# EAGLE board miranda_hector_115clock-2 (EAGLE 9.6.2)
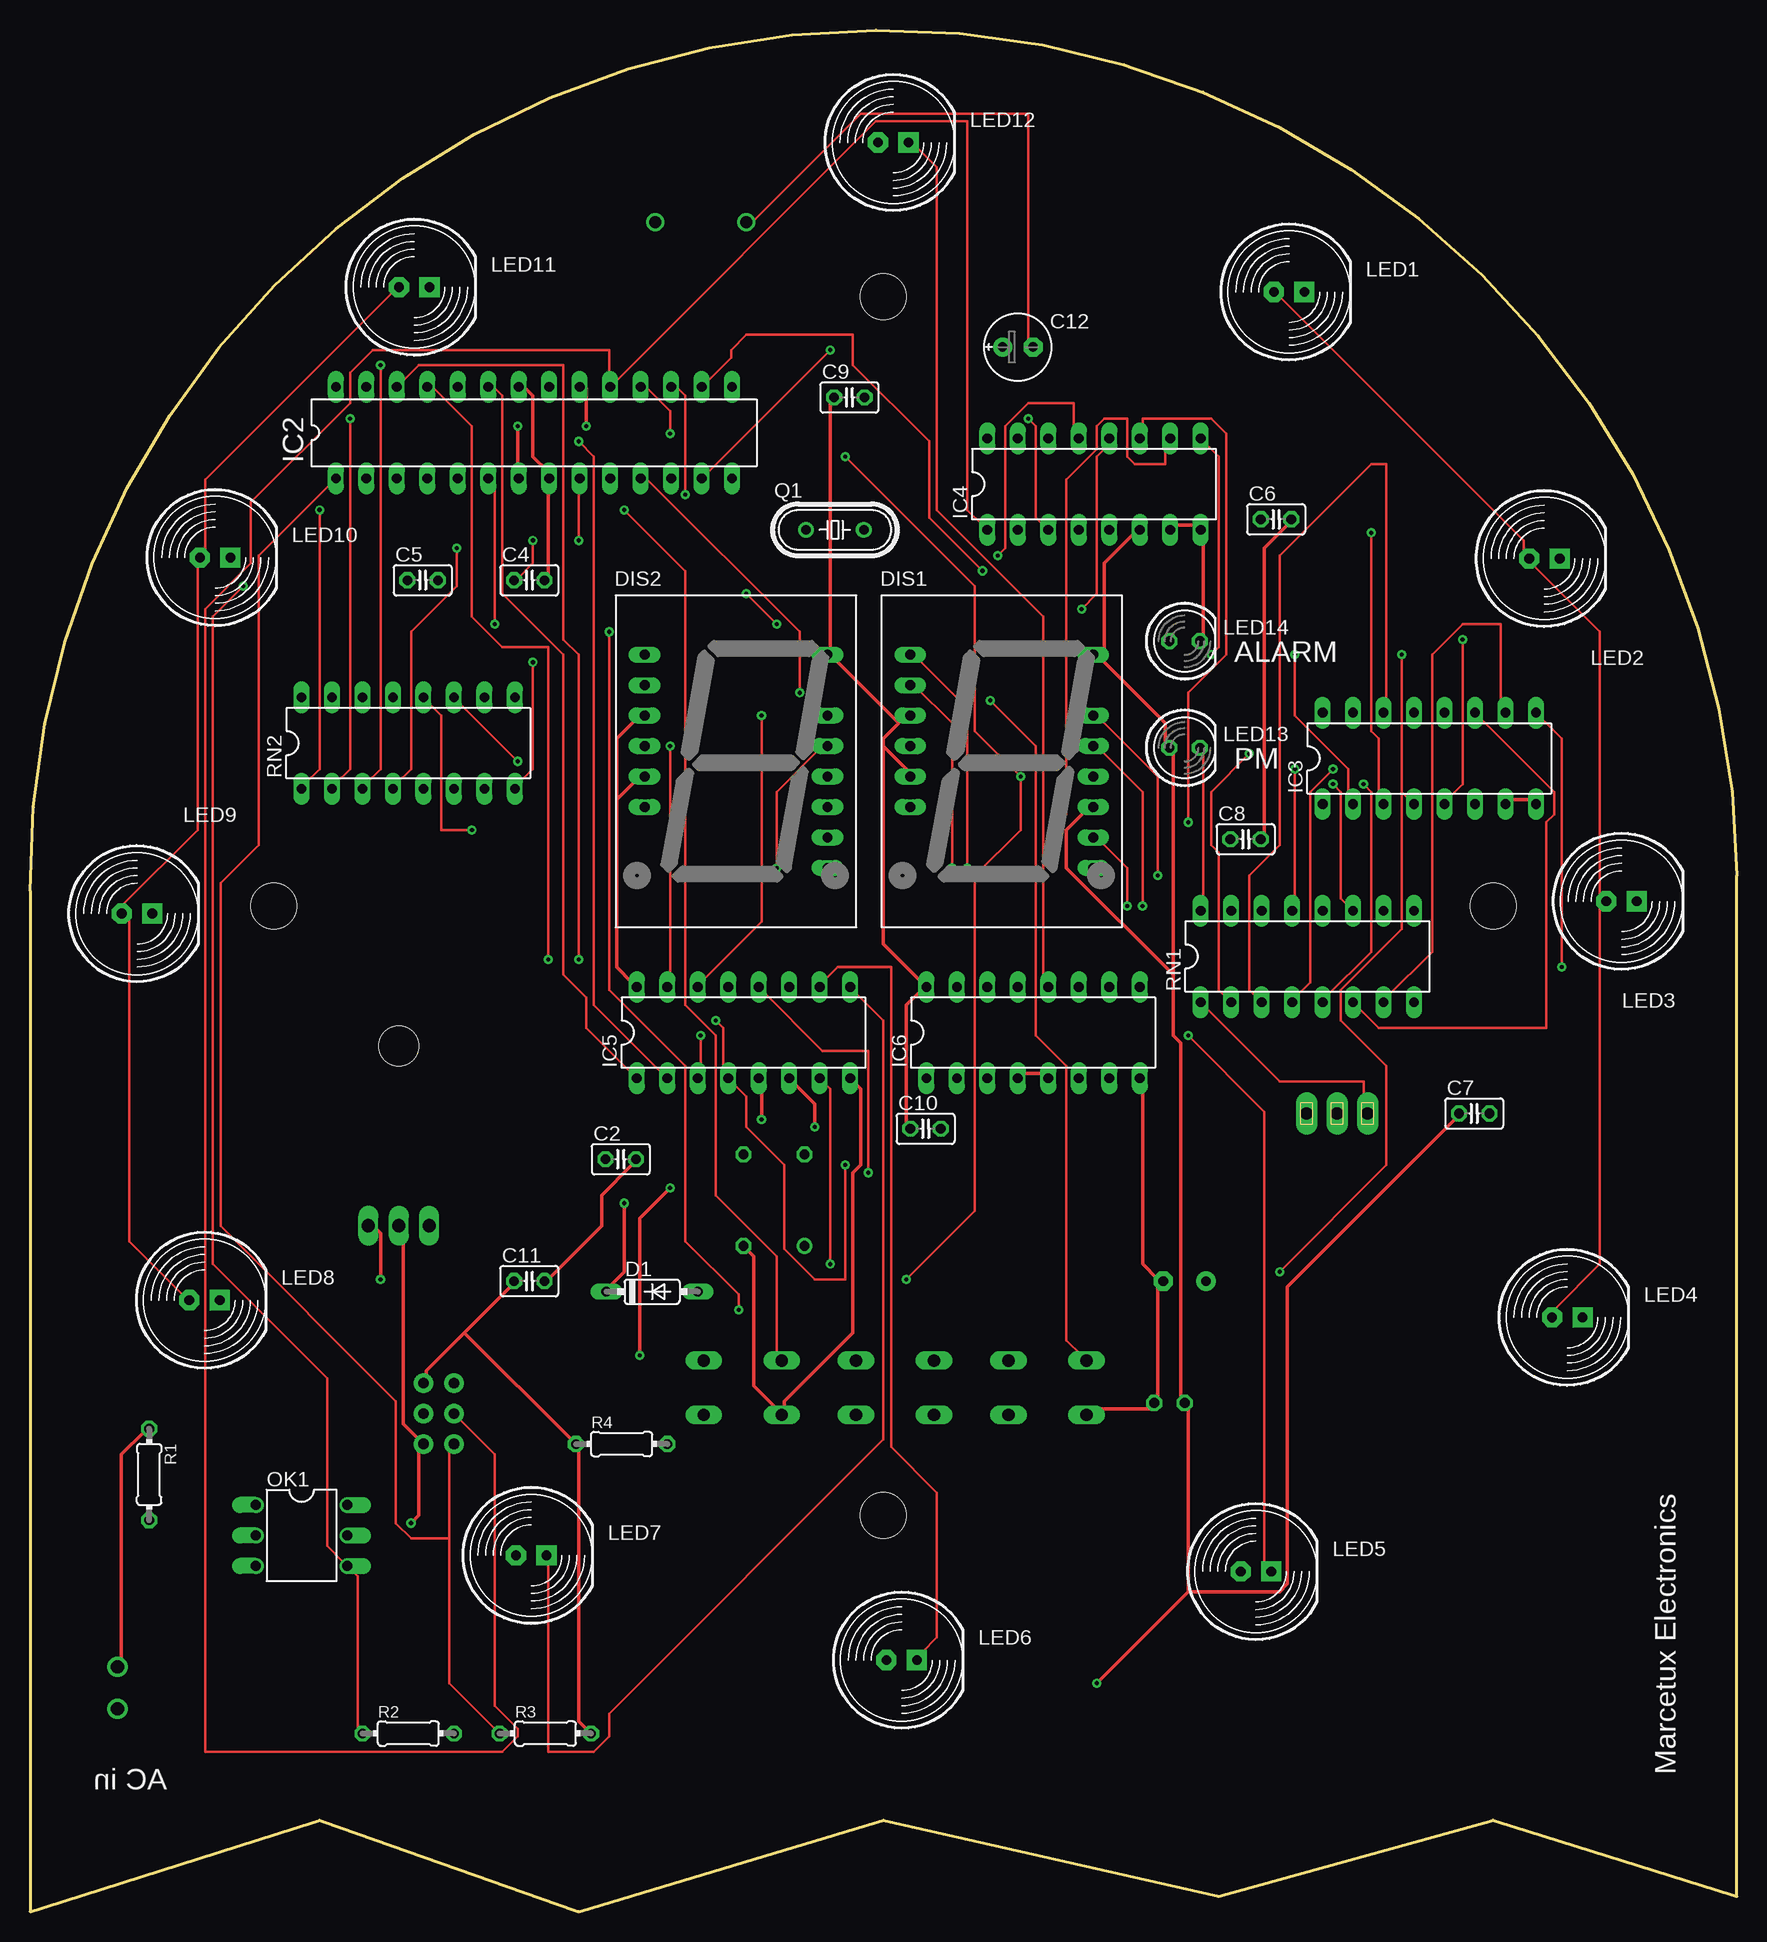
[diagram p0: board, top side]
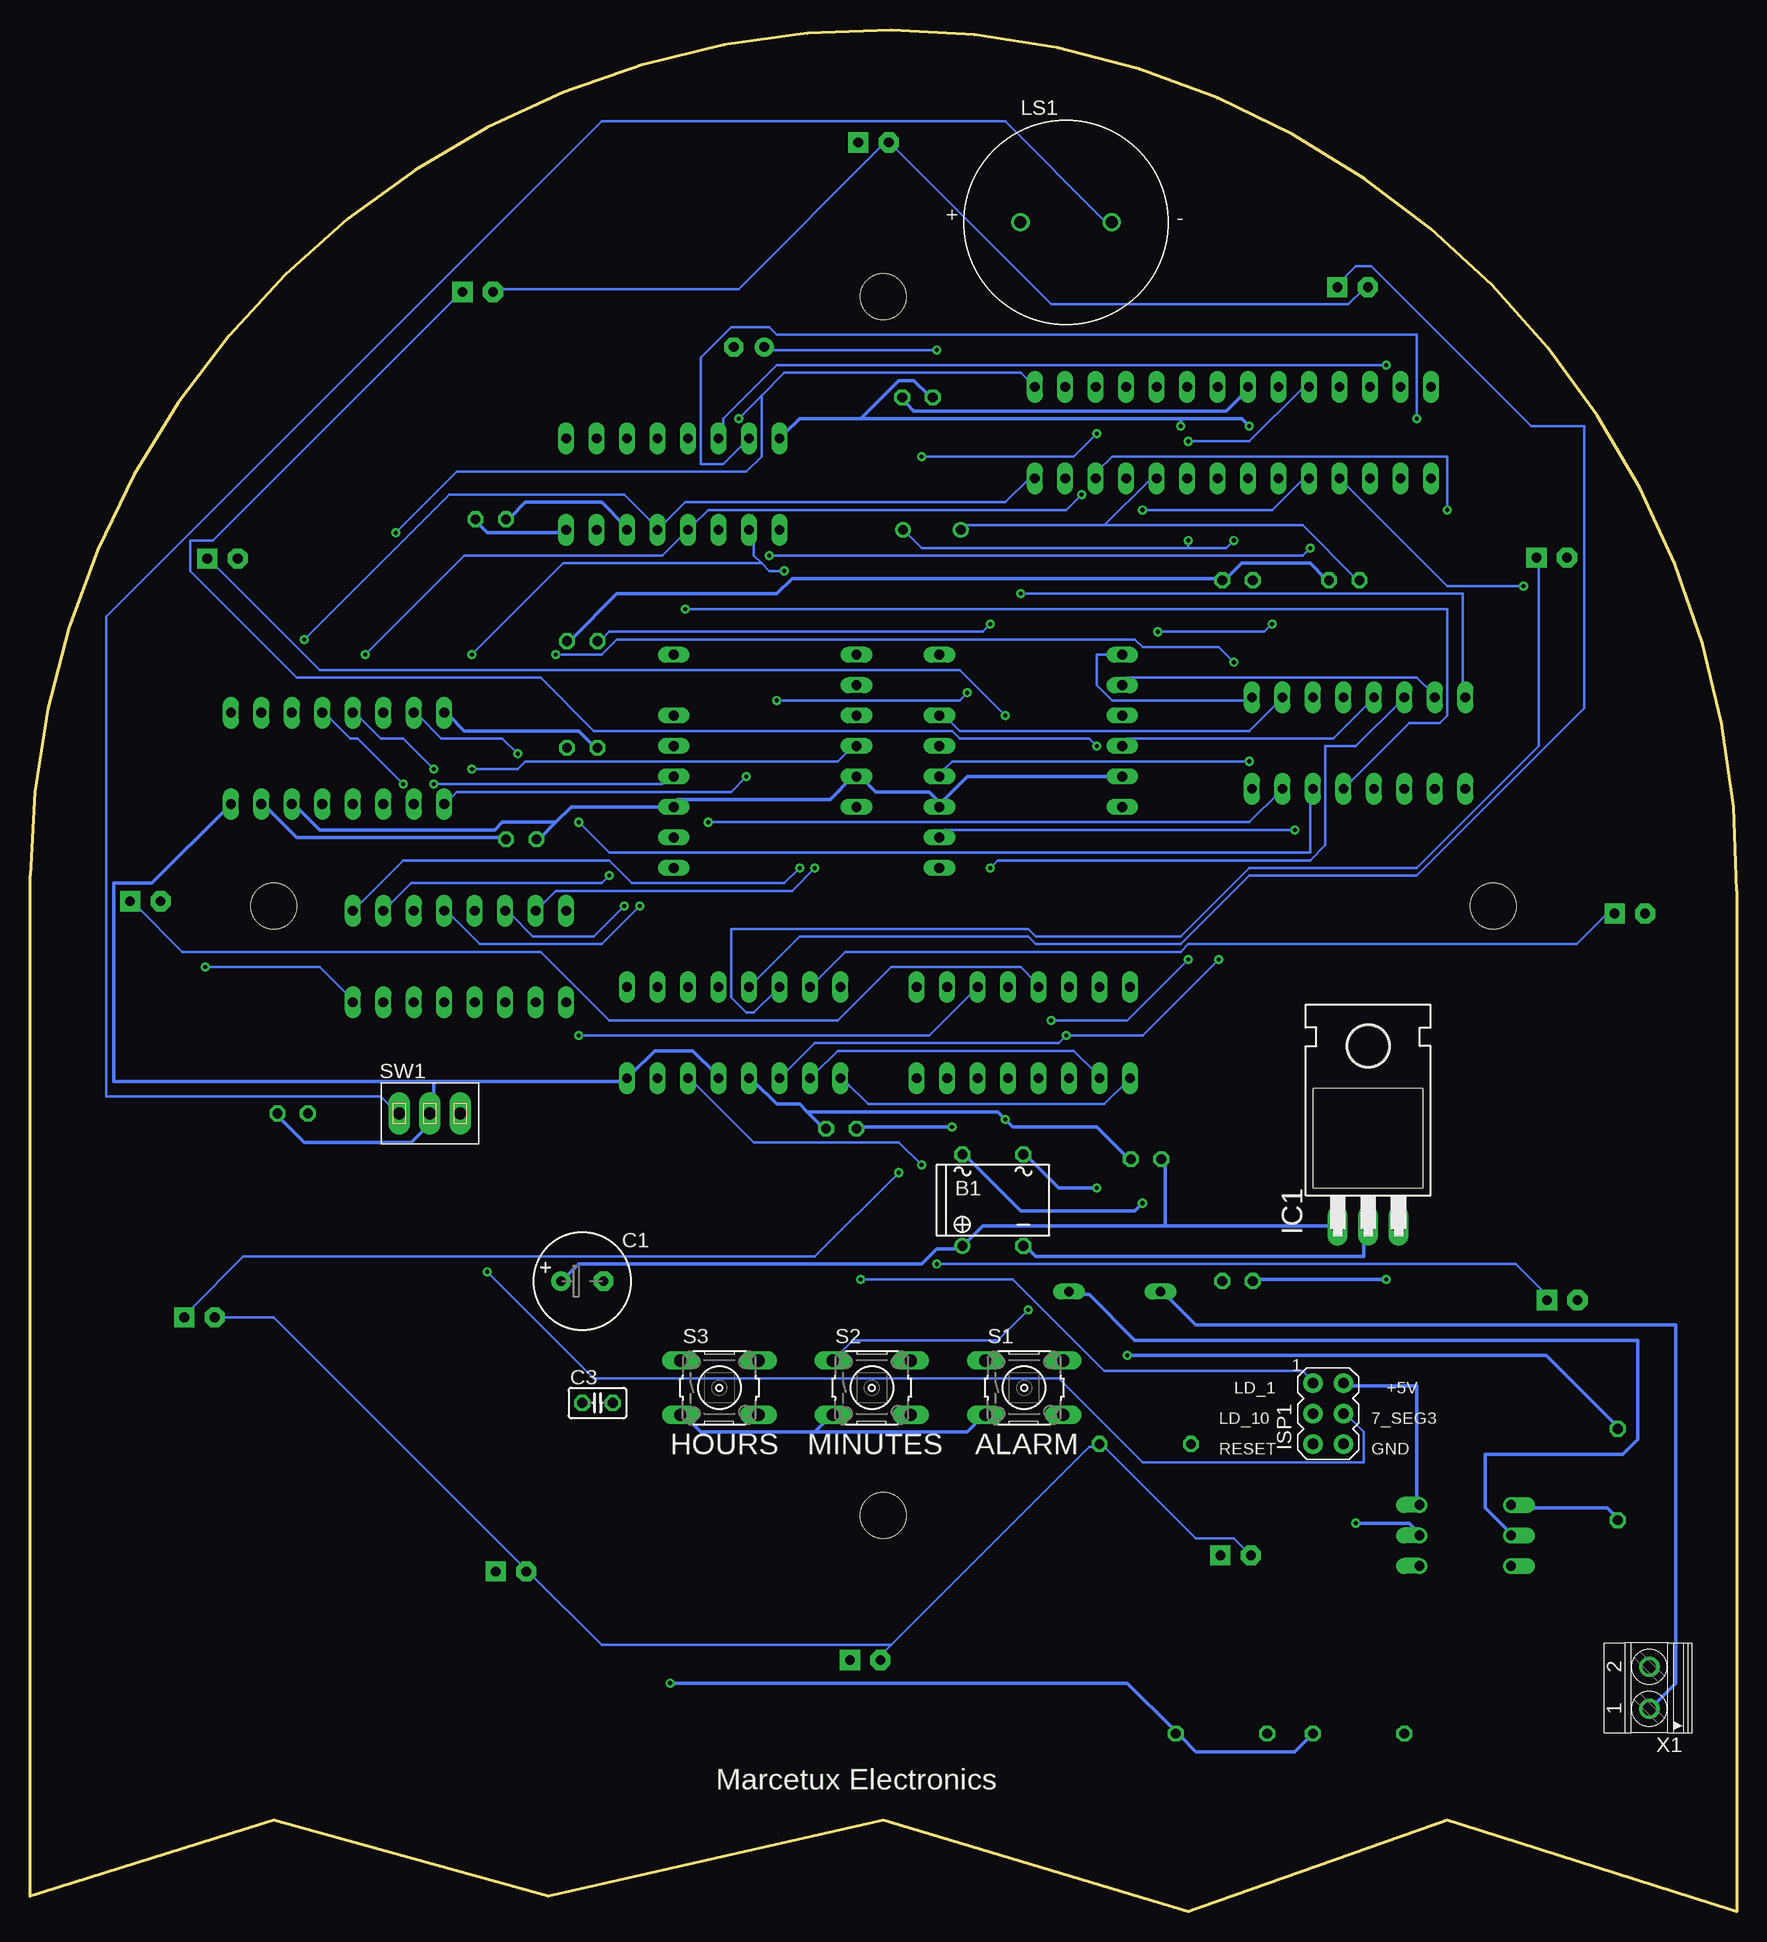
[diagram p1: board, bottom side, seen from below]

Size 142.24 x 156.84 mm. Coordinates in mm from the lower left corner, seen from the top.
Outline: 0,85.09 0,0 24.13,7.62 45.72,0 71.12,7.62 99.06,1.27 121.92,7.62 142.24,1.27 142.24,86.36 arc180 0,85.09
Copper layers (1*16): Top 0.035mm / dielectric 1.5mm / Bottom 0.035mm
Design rules "default": minimum track width 6mil, minimum drill 0.35mm, track to track 6mil, track to pad 6mil, pad to pad 6mil, via to via 6mil, smd to smd 6mil, copper to edge 40mil, drill to drill 6mil, minimum pad ring 10mil, minimum via ring 8mil, stop-mask expansion 4mil, vias tented up to drill 0mil, thermal gap 10mil
Net classes: 0 default: width 0.203 mm, clearance 0.203 mm; 1 AC: width 0.305 mm, clearance 0.762 mm; 2 Power: width 0.305 mm, clearance 0.305 mm
Holes 3.81 mm at 71.12,134.62 71.12,33.02 20.32,83.82 121.92,83.82
tRestrict: area 67.3,130.8 to 74.9,138.4; area 16.3,79.8 to 24.3,87.8; area 117.9,79.8 to 125.9,87.8; area 67.1,29 to 75.1,37; area 16.5,59.7 to 44.5,77.5
bRestrict: area 16.5,59.7 to 44.5,77.5

## Footprints (pad centres in the part's own frame; a part is rotated, then mirrored left to right if it is on the bottom)
B-DIL = drill 0.813: + -2.54,-3.81 | drill 0.813 octagon: - 2.54,-3.81; AC1 2.54,3.81; AC2 -2.54,3.81
E3,5-8 = drill 0.813 pad 1.6: + -1.778,0 | drill 0.813 pad 1.6 octagon: - 1.778,0
C025-025X050 = drill 0.813 octagon: 1 -1.27,0; 2 1.27,0
E2,5-6E = drill 0.813 pad 1.575: + -1.27,0 | drill 0.813 pad 1.575 octagon: - 1.27,0
DO35-7 = drill 0.813 long: A 3.81,0; C -3.81,0
HDSP-Q = drill 0.813 long: 2 -7.62,8.89; 3 -7.62,6.35; 4 -7.62,3.81; 5 -7.62,1.27; 6 -7.62,-1.27; 7 -7.62,-3.81; 10 7.62,-8.89; 11 7.62,-6.35; 12 7.62,-3.81; 13 7.62,-1.27; 14 7.62,1.27; 15 7.62,3.81; 17 7.62,8.89
TO220H = drill 1.118 long: 1 -2.54,-10.16; 2 0,-10.16; 3 2.54,-10.16 | hole 3.302: 0,4.826
DIL28-3 = drill 0.813 long: 1 -16.51,-3.81; 2 -13.97,-3.81; 3 -11.43,-3.81; 4 -8.89,-3.81; 5 -6.35,-3.81; 6 -3.81,-3.81; 7 -1.27,-3.81; 8 1.27,-3.81; 9 3.81,-3.81; 10 6.35,-3.81; 11 8.89,-3.81; 12 11.43,-3.81; 13 13.97,-3.81; 14 16.51,-3.81; 15 16.51,3.81; 16 13.97,3.81; 17 11.43,3.81; 18 8.89,3.81; 19 6.35,3.81; 20 3.81,3.81; 21 1.27,3.81; 22 -1.27,3.81; 23 -3.81,3.81; 24 -6.35,3.81; 25 -8.89,3.81; 26 -11.43,3.81; 27 -13.97,3.81; 28 -16.51,3.81
DIL16 = drill 0.813 long: 1 -8.89,-3.81; 2 -6.35,-3.81; 3 -3.81,-3.81; 4 -1.27,-3.81; 5 1.27,-3.81; 6 3.81,-3.81; 7 6.35,-3.81; 8 8.89,-3.81; 9 8.89,3.81; 10 6.35,3.81; 11 3.81,3.81; 12 1.27,3.81; 13 -1.27,3.81; 14 -3.81,3.81; 15 -6.35,3.81; 16 -8.89,3.81
AVRISP = drill 0.9 pad 1.626: 1 -1.27,2.54; 2 1.27,2.54; 3 -1.27,0; 4 1.27,0; 5 -1.27,-2.54; 6 1.27,-2.54
LED10MM = drill 0.813 pad 1.676 octagon: A -1.27,0 | drill 0.813 pad 1.676 square: K 1.27,0
LED5MM = drill 0.813 octagon: A -1.27,0; K 1.27,0
SPKR_CVS-1708 = drill 1: M 3.8,0; P -3.8,0
DIL06 = drill 0.813 offset: 1 -2.54,-3.81; 2 0,-3.81; 3 2.54,-3.81; 4 2.54,3.81; 5 0,3.81; 6 -2.54,3.81
HC49/S = drill 0.813: 1 -2.413,0; 2 2.413,0
0204/7 = drill 0.813 octagon: 1 -3.81,0; 2 3.81,0
B3F-10XX = drill 1.016 long: 1 -3.251,2.261; 2 3.251,2.261; 3 -3.251,-2.261; 4 3.251,-2.261
FOOTPRINT_DIGICLOCK_S5 = drill 1.016 pad 1.778 long: 1 -2.54,0; 2 0,0; 3 2.54,0
1751248 = drill 1.1 pad 1.7: 1 -1.75,-0.1; 2 1.75,-0.1

## Placement (x,y rotation side)
B1  [B-DIL]  62,59.3 0 bottom
C1  470uF  [E3,5-8]  96.22,52.56 0 bottom
C2  0.1uF  [C025-025X050]  49.23,62.72 0 top
C3  0.1uF  [C025-025X050]  94.95,42.4 0 bottom
C4  22pF  [C025-025X050]  41.61,110.98 0 top
C5  22pF  [C025-025X050]  32.72,110.98 0 top
C6  0.1uF  [C025-025X050]  103.84,116.06 0 top
C7  0.1uF  [C025-025X050]  120.35,66.53 0 top
C8  0.1uF  [C025-025X050]  101.3,89.39 0 top
C9  0.1uF  [C025-025X050]  68.28,126.22 0 top
C10  0.1uF  [C025-025X050]  74.63,65.26 0 top
C11  0.1uF  [C025-025X050]  41.61,52.56 0 top
C12  10uF  [E2,5-6E]  82.32,130.42 0 top
D1  1N4148DO35-7  [DO35-7]  51.84,51.68 0 top
DIS1  HD-N100  [HDSP-Q]  80.98,95.89 0 top
DIS2  HD-N100  [HDSP-Q]  58.84,95.89 0 top
IC1  7805T  [TO220H]  30.73,67.33 0 bottom
IC2  MEGA328-P  [DIL28-3]  42,123.28 0 top
IC3  4543N  [DIL16]  116.61,96.13 0 top
IC4  4543N  [DIL16]  88.67,118.99 0 top
IC5  74LS138N  [DIL16]  59.46,73.27 0 top
IC6  74LS138N  [DIL16]  83.59,73.27 0 top
ISP1  AVRISP-6  [AVRISP]  34.06,41.52 0 bottom
LED1  [LED10MM]  104.93,135.01 0 top
LED2  [LED10MM]  126.2,112.79 0 top
LED3  [LED10MM]  132.63,84.22 0 top
LED4  [LED10MM]  128.11,49.54 0 top
LED5  [LED10MM]  102.16,28.35 0 top
LED6  [LED10MM]  72.64,20.97 0 top
LED7  [LED10MM]  41.77,29.7 0 top
LED8  [LED10MM]  14.55,50.97 0 top
LED9  [LED10MM]  8.92,83.19 0 top
LED10  [LED10MM]  15.43,112.87 0 top
LED11  [LED10MM]  32.02,135.41 0 top
LED12  [LED10MM]  71.94,147.47 0 top
LED13  [LED5MM]  96.22,97.01 0 top
LED14  [LED5MM]  96.22,105.9 0 top
LS1  CVS-1708  [SPKR_CVS-1708]  55.9,140.82 0 bottom
OK1  H11L1M  [DIL06]  22.63,31.36 270 top
Q1  16Mhz  [HC49/S]  67.08,115.18 0 top
R1  1K  [0204/7]  9.93,36.44 270 top
R2  1K  [0204/7]  31.52,14.85 0 top
R3  1K  [0204/7]  42.95,14.85 0 top
R4  330  [0204/7]  49.3,38.98 0 top
RN1  330  [DIL16]  106.45,79.62 0 top
RN2  330  [DIL16]  31.52,97.4 0 top
S1  [B3F-10XX]  59.39,43.67 0 bottom
S2  [B3F-10XX]  72.09,43.67 0 bottom
S3  [B3F-10XX]  84.79,43.67 0 bottom
SW1  [FOOTPRINT_DIGICLOCK_S5]  108.92,66.53 0 bottom
X1  1751248  [1751248]  7.39,18.66 90 bottom

## Library data of the parts
B1 = rectifier
C1-C12 = rcl; SPICEPREFIX: C
D1 = diode
DIS1 DIS2 = display-hp; OC_FARNELL: unknown; OC_NEWARK: unknown
IC1 = linear
IC2 = atmel; OC_FARNELL: unknown; OC_NEWARK: unknown
IC3 IC4 = 45xx
IC5 IC6 = 74xx-eu
ISP1 = adafruit
LED1-LED14 = led
LS1 = CVS-1708; AVAILABILITY: Good; DESCRIPTION: CLS Series 8 Ohm 1500 Hz 87 dB 0.2 W Ø 17 x 8 mm Magnetic Speaker; MF: CUI; MP: CVS-1708; PACKAGE: CUI; PRICE: 2.13 USD
OK1 = optocoupler; MF: FAIRCHILD SEMICONDUCTOR; MPN: H11L1-M; OC_FARNELL: 1021127; OC_NEWARK: 72K8643
Q1 = crystal; OC_FARNELL: 1667008; OC_NEWARK: unknown
R1-R4 = rcl; SPICEPREFIX: R
RN1 RN2 = resistor-dil; OC_FARNELL: unknown; OC_NEWARK: unknown
S1-S3 = switch-omron; MPN: B3F-1000; OC_FARNELL: 176432; OC_NEWARK: 36M3542
SW1 = Digiclock_S5
X1 = con-phoenix-350; OC_FARNELL: unknown; OC_NEWARK: unknown

## Nets
7_SEG0: IC2.14 IC3.5 IC4.5
7_SEG1: IC2.15 IC3.3 IC4.3
7_SEG2: IC2.16 IC3.2 IC4.2
7_SEG3: IC2.17 IC3.4 IC4.4 ISP1.4
+5V [Power]: C3.1 C6.1 C7.1 C8.1 C9.1 C10.1 C11.1 DIS1.4 DIS1.6 DIS1.12 DIS1.17 DIS2.4 DIS2.6 DIS2.12 DIS2.17 IC1.3 IC2.7 IC2.20 IC3.6 IC3.16 IC4.6 IC4.16 IC5.6 IC5.16 IC6.16 ISP1.2 LED13.A OK1.6 R2.2 R3.2 R4.1
ALARM_ON/OFF: LS1.M RN1.1 SW1.1
ALARM_OUT: C12.+ IC2.13
ALARM_SET: IC2.11 S3.1
AM/PM: IC2.12 RN2.1
GND [Power]: B1.- C1.- C2.2 C3.2 C4.2 C5.2 C6.2 C7.2 C8.2 C9.2 C10.2 C11.2 IC1.2 IC2.8 IC2.22 IC3.7 IC3.8 IC4.7 IC4.8 IC5.5 IC5.8 IC6.4 IC6.5 IC6.8 ISP1.6 LED14.K OK1.5 S1.3 S2.3 S3.3 SW1.2
HOURS_SET: IC2.6 S2.1
INT_0: IC2.4 OK1.4 R2.1
LD_1: IC2.18 IC3.1 ISP1.1
LD_10: IC2.19 IC4.1 ISP1.3
LED_ADDR0: IC2.23 IC5.1 IC6.1
LED_ADDR1: IC2.24 IC5.2 IC6.2
LED_ADDR2: IC2.25 IC5.3 IC6.3
LED_ADDR3: IC2.26 IC5.4 IC6.6
MINUTES_SET: IC2.5 S1.1
N$1 [AC]: B1.AC2 D1.C X1.1
N$2 [AC]: B1.AC1 R1.1 X1.2
N$3 [AC]: OK1.1 R1.2
N$4 [AC]: D1.A OK1.2
N$5: C4.1 IC2.9 Q1.2
N$6: C5.1 IC2.10 Q1.1
N$7 [Power]: B1.+ C1.+ C2.1 IC1.1
N$8: DIS1.2 RN1.9
N$9: DIS1.15 RN1.10
N$10: DIS1.13 RN1.11
N$11: DIS1.11 RN1.12
N$12: DIS1.5 RN1.13
N$13: DIS1.3 RN1.15
N$14: DIS1.14 RN1.14
N$15: IC3.9 RN1.8
N$16: IC3.10 RN1.7
N$17: IC3.11 RN1.6
N$18: IC3.12 RN1.5
N$19: IC3.13 RN1.4
N$20: IC3.15 RN1.2
N$21: IC3.14 RN1.3
N$22: DIS2.2 RN2.9
N$23: DIS2.15 RN2.10
N$24: DIS2.13 RN2.11
N$25: DIS2.11 RN2.12
N$26: DIS2.5 RN2.13
N$27: DIS2.3 RN2.15
N$28: DIS2.14 RN2.14
N$29: IC4.9 RN2.8
N$30: IC4.10 RN2.7
N$31: IC4.11 RN2.6
N$32: IC4.12 RN2.5
N$33: IC4.13 RN2.4
N$34: IC4.15 RN2.2
N$35: IC4.14 RN2.3
N$36: IC5.15 LED1.K
N$37: LED1.A LED2.A LED3.A LED4.A LED5.A LED6.A LED7.A LED8.A LED9.A LED10.A LED11.A LED12.A R4.2
N$38: IC5.14 LED2.K
N$39: IC5.13 LED3.K
N$40: IC5.12 LED4.K
N$41: IC5.11 LED5.K
N$42: IC5.10 LED6.K
N$43: IC5.9 LED7.K
N$44: IC5.7 LED8.K
N$45: IC6.15 LED9.K
N$46: IC6.14 LED10.K
N$47: IC6.13 LED11.K
N$48: IC6.12 LED12.K
N$50: LED13.K RN1.16
N$51: LED14.A RN2.16
N$52: C12.- LS1.P
RESET: IC2.1 ISP1.5 R3.1
RX: IC2.2
TX: IC2.3

## Tracks (layer width: path | path; a pad name or v marks a point on that pad's centre or on a via)
7_SEG0  (via drill 0.35)
  Top 0.203: v119.38,106.04 119.38,93.98 118.11,92.71 IC3.5
  Bottom 0.203: IC2.14 59.06,119.38 60.96,117.47 87.63,117.47 89.53,115.57 IC4.5 90.17,115.57 92.71,118.11 107.31,118.11 v119.38,106.04
7_SEG1  (via drill 0.35)
  Top 0.203: v83.19,124.46 83.82,123.82 83.82,116.2 84.46,115.57 IC4.3 | v111.76,114.93 111.76,98.42 112.4,97.79 112.4,92.71 IC3.3
  Bottom 0.203: IC2.15 59.69,128.27 79.38,128.27 81.28,126.36 | v83.19,124.46 81.28,126.36 | v111.76,114.93 106.68,120.01 82.55,120.01 81.28,121.28 81.28,126.36
7_SEG2  (via drill 0.35)
  Top 0.203: IC2.16 58.42,129.54 58.42,130.17 59.69,131.44 68.58,131.44 68.58,128.91 74.93,122.55 74.93,116.2 v79.38,111.76 | v105.41,104.77 105.41,99.69 109.86,95.25 109.86,92.71 IC3.2
  Bottom 0.203: v79.38,111.76 80.65,111.76 81.28,112.39 | 81.28,112.39 81.92,113.03 81.92,114.93 IC4.2 | v105.41,104.77 97.79,112.39 81.28,112.39
7_SEG3  (via drill 0.35)
  Top 0.203: v54.61,118.11 54.61,126.36 53.98,127 IC2.17 | 114.3,93.34 114.94,92.71 IC3.4 | v114.3,104.77 114.3,93.34 | v104.14,53.34 113.03,62.23 113.03,70.48 109.22,74.29 109.22,76.83 114.3,81.91 114.3,93.34
  Bottom 0.203: v54.61,118.11 55.88,116.84 85.73,116.84 87,115.57 IC4.4 87.63,114.93 89.53,113.03 106.05,113.03 v114.3,104.77 | v104.14,53.34 95.25,44.45 56.52,44.45 49.53,37.46 31.12,37.46 31.12,40 32.39,41.27 ISP1.4
+5V  (via drill 0.35)
  Top 0.305: v40.64,123.82 40.64,120.01 IC2.7 | v46.36,123.82 46.36,127 IC2.20 | v65.41,65.41 65.41,67.31 63.5,69.21 IC5.6 | C10.1 73.03,65.41 73.03,75.56 74.3,76.83 IC6.16 74.3,77.47 71.12,80.64 71.12,97.16 | 72.39,99.06 71.12,97.79 71.12,97.16 | 72.39,99.06 73.03,99.69 DIS1.4 | 71.12,97.16 73.03,95.25 DIS1.6 | 72.39,99.06 66.68,104.77 DIS2.17 66.68,105.41 66.68,125.73 C9.1 | 48.9,92.71 48.9,78.74 50.17,77.47 IC5.16 | 48.9,92.71 50.8,94.61 DIS2.6 | 48.9,92.71 48.9,97.79 50.8,99.69 DIS2.4 | 36.2,48.26 33.02,45.08 33.02,44.45 ISP1.2 | 36.2,48.26 40.01,52.07 C11.1 | 36.2,48.26 45.09,39.37 R4.1 45.72,38.73 45.72,15.88 46.36,15.24 R3.2 | v29.21,52.7 29.21,56.51 28.58,57.15 IC1.3 | 95.25,78.1 95.25,96.52 LED13.A 94.62,97.16 94.62,99.06 89.53,104.14 | 95.25,78.1 95.25,73.02 95.89,72.39 95.89,42.54 C3.1 96.52,41.91 96.52,26.67 | 96.52,26.67 104.14,26.67 104.78,27.3 104.78,52.07 118.75,66.04 C7.1 | 89.53,104.14 88.9,104.77 DIS1.17 89.53,104.14 | 89.53,104.14 89.53,112.39 92.08,114.93 IC4.6 | 96.52,26.67 v88.9,19.05 | 95.25,78.1 86.36,86.99 86.36,90.17 88.27,92.07 DIS1.12
  Bottom 0.305: v40.64,123.82 41.28,124.46 46.36,124.46 | 73.03,124.46 78.11,124.46 79.38,123.19 IC4.16 | 73.03,124.46 46.36,124.46 | 73.03,124.46 69.85,127.63 68.58,127.63 67.31,126.36 C9.1 | 46.36,124.46 v46.36,123.82 | 98.43,90.8 99.7,89.53 C8.1 | 98.43,90.8 97.16,92.07 88.9,92.07 DIS1.12 88.27,92.71 75.56,92.71 73.66,94.61 DIS1.6 73.03,94.61 71.76,93.34 67.31,93.34 66.68,92.71 DIS2.12 66.04,92.71 64.14,94.61 51.44,94.61 DIS2.6 | 98.43,90.8 102.87,90.8 103.5,90.17 118.11,90.17 120.02,92.07 IC3.6 | v65.41,65.41 73.03,65.41 C10.1 | R2.2 35.56,14.6 36.83,13.33 45.09,13.33 46.36,14.6 R3.2 46.99,15.24 50.8,19.05 v88.9,19.05 | OK1.6 26.67,34.29 26.67,43.81 32.39,43.81 ISP1.2 | v29.21,52.7 40.01,52.7 C11.1 | IC3.16 107.31,99.69 106.05,98.42 96.52,98.42 95.25,97.16 LED13.A | C6.1 102.23,116.2 100.97,117.47 94.62,117.47 92.71,115.57 IC4.6
ALARM_ON/OFF
  Top 0.203: RN1.1 97.79,75.56 104.14,69.21 111.12,69.21 111.12,66.67 SW1.1
  Bottom 0.203: LS1.M 52.71,140.97 60.96,149.22 94.62,149.22 135.89,107.95 135.89,67.94 113.03,67.94 111.76,66.67 SW1.1
ALARM_OUT  (via drill 0.35)
  Top 0.203: v66.68,130.17 IC2.13
  Bottom 0.203: v66.68,130.17 80.65,130.17 C12.+
ALARM_SET  (via drill 0.35)
  Top 0.203: v64.14,101.6 64.14,106.68 51.44,119.38 IC2.11 | v80.01,100.96 83.82,97.16 83.82,73.02 86.36,70.48 86.36,47.62 87.63,46.35 S3.1
  Bottom 0.203: v64.14,101.6 64.77,100.96 v80.01,100.96
AM/PM  (via drill 0.35)
  Top 0.203: v24.13,116.84 24.13,95.25 22.86,93.98 RN2.1
  Bottom 0.203: v24.13,116.84 24.13,121.28 52.07,121.28 53.34,120.01 IC2.12
GND  (via drill 0.35)
  Top 0.305: C4.2 43.18,111.12 43.18,119.38 IC2.8 43.18,120.01 41.91,121.28 41.91,126.36 41.28,127 IC2.22 | LED14.K 97.79,106.04 97.79,114.93 IC4.8 97.16,115.57 95.25,115.57 IC4.7 | IC3.8 125.09,92.71 123.19,92.71 IC3.7 | C6.2 104.78,115.57 102.87,113.66 102.87,89.53 C8.2 | v31.75,32.38 32.39,33.02 32.39,38.73 ISP1.6 32.39,39.37 31.12,40.64 31.12,57.15 IC1.2 | B1.- 59.69,55.24 60.33,54.61 60.33,43.81 62.23,41.91 S1.3 62.87,41.91 62.87,42.54 68.58,48.26 68.58,61.59 69.22,62.23 69.22,68.58 68.58,69.21 IC5.8 | C11.2 43.18,52.7 47.62,57.15 47.62,59.69 50.17,62.23 C2.2 | v60.96,66.04 60.96,69.21 IC5.5 | S3.3 88.27,41.91 93.34,41.91 C3.2 93.98,42.54 93.98,52.07 C1.- 93.98,52.7 92.71,53.97 92.71,69.21 IC6.8 | IC6.5 84.46,69.85 82.55,69.85 IC6.4
  Bottom 0.305: C5.2 34.29,111.12 35.56,112.39 41.28,112.39 42.55,111.12 C4.2 43.18,111.12 78.74,111.12 80.01,109.85 93.34,109.85 97.16,106.04 LED14.K | C9.2 69.22,125.73 68.58,125.09 42.55,125.09 40.64,127 IC2.22 | C6.2 104.78,115.57 104.14,114.93 97.79,114.93 IC4.8 | C8.2 102.87,89.53 120.02,89.53 122.56,92.07 IC3.7 | v31.75,32.38 27.31,32.38 26.67,31.75 OK1.5 | IC1.2 31.12,57.15 31.12,54.61 58.42,54.61 59.06,55.24 B1.- | C2.2 50.8,62.86 53.34,65.41 60.33,65.41 v60.96,66.04 61.6,66.67 77.47,66.67 | 76.84,40 75.56,41.27 S2.3 | 76.84,40 86.36,40 87.63,41.27 S3.3 | C7.2 121.28,66.04 119.38,64.13 110.49,64.13 108.59,66.04 SW1.2 108.59,66.67 108.59,69.21 | 77.47,66.67 78.11,67.31 80.01,67.31 81.92,69.21 IC6.4 | 77.47,66.67 76.2,65.41 C10.2 | IC6.5 85.09,69.85 87,71.75 90.17,71.75 92.08,69.85 IC6.8 92.71,69.21 108.59,69.21 | 76.84,40 64.14,40 62.87,41.27 S1.3 | 108.59,69.21 135.25,69.21 135.25,85.72 132.08,85.72 125.73,92.07 IC3.8
HOURS_SET  (via drill 0.35)
  Top 0.203: v38.74,107.31 38.74,119.38 IC2.6 | v48.26,106.68 48.26,76.83 54.61,70.48 54.61,55.88 59.06,51.43 v59.06,50.16
  Bottom 0.203: v38.74,107.31 39.37,106.68 v48.26,106.68 | v59.06,50.16 61.6,47.62 73.66,47.62 74.93,46.35 S2.1
INT_0  (via drill 0.35)
  Top 0.203: R2.1 27.31,15.24 27.31,27.94 26.67,28.57 OK1.4 26.04,29.21 24.77,30.48 24.77,44.45 15.24,53.97 15.24,107.95 v17.78,110.49
  Bottom 0.203: IC2.4 24.13,110.49 v17.78,110.49
LD_1  (via drill 0.35)
  Top 0.203: v53.34,123.19 53.34,125.09 51.44,127 IC2.18 | v67.95,121.28 78.74,110.49 78.74,98.42 v82.55,94.61 82.55,90.17 78.74,86.36 78.74,58.42 v73.03,52.7
  Bottom 0.203: v53.34,123.19 55.25,121.28 v67.95,121.28 | v82.55,94.61 83.82,93.34 106.68,93.34 107.31,92.71 IC3.1 | v73.03,52.7 60.33,52.7 52.71,45.08 36.2,45.08 35.56,44.45 ISP1.1
LD_10
  Top 0.203: IC4.1 79.38,115.57 78.11,116.84 78.11,149.22 70.48,149.22 IC2.19 48.26,127.63 48.26,130.17 28.58,130.17 26.67,128.27 26.67,125.73 18.42,117.47 18.42,112.39 14.61,108.58 14.61,13.33 39.37,13.33 40.64,14.6 40.64,15.24 38.74,17.14 38.74,38.1 35.56,41.27 ISP1.3
LED_ADDR0
  Top 0.203: IC2.23 38.74,127 39.37,126.36 39.37,109.85 44.45,104.77 44.45,78.1 46.36,76.2 46.36,73.66 50.17,69.85 IC5.1
  Bottom 0.203: IC5.1 50.8,69.21 52.71,67.31 72.39,67.31 74.3,69.21 IC6.1
LED_ADDR1  (via drill 0.35)
  Top 0.203: v45.72,122.55 46.99,121.28 46.99,75.56 52.71,69.85 IC5.2
  Bottom 0.203: IC5.2 53.34,69.85 55.25,71.75 74.93,71.75 76.84,69.85 IC6.2 | v45.72,122.55 40.64,122.55 36.2,127 IC2.24
LED_ADDR2  (via drill 0.35)
  Top 0.203: v55.88,73.02 55.88,69.85 IC5.3 | v43.18,79.38 43.18,105.41 39.37,105.41 36.83,107.95 36.83,123.82 33.66,127 IC2.25
  Bottom 0.203: IC6.3 79.38,69.85 76.84,72.39 56.52,72.39 v55.88,73.02 49.53,73.02 v43.18,79.38
LED_ADDR3  (via drill 0.35)
  Top 0.203: v67.95,62.23 67.95,52.7 65.41,52.7 62.87,55.24 62.87,62.23 59.69,65.41 59.69,67.94 58.42,69.21 IC5.4 57.79,69.85 57.79,73.66 v57.15,74.29 | IC2.26 32.39,128.91 44.45,128.91 44.45,106.04 45.72,104.77 v45.72,79.38
  Bottom 0.203: v67.95,62.23 69.85,64.13 81.92,64.13 87,69.21 IC6.6 | v45.72,79.38 50.8,74.29 v57.15,74.29
MINUTES_SET  (via drill 0.35)
  Top 0.203: v49.53,116.84 54.61,111.76 54.61,75.56 57.15,73.02 57.15,59.69 62.23,54.61 62.23,46.35 S1.1
  Bottom 0.203: v49.53,116.84 38.74,116.84 36.2,119.38 IC2.5
N$1  (via drill 0.35)
  Top 0.305: v49.53,59.05 49.53,53.34 48.26,52.07 D1.C
  Bottom 0.305: v49.53,59.05 50.17,58.42 59.69,58.42 64.14,62.86 B1.AC2 | X1.1 6.98,17.14 5.08,19.05 5.08,48.89 45.09,48.89 47.62,51.43 D1.C
N$2  (via drill 0.35)
  Top 0.305: R1.1 9.53,40 7.62,38.1 7.62,20.95 X1.2 | v53.34,60.32 50.8,57.78 v50.8,46.35
  Bottom 0.305: v53.34,60.32 56.52,60.32 59.06,62.86 B1.AC1 | v50.8,46.35 15.88,46.35 10.16,40.64 R1.1
N$3
  Bottom 0.305: R1.2 10.16,33.02 10.8,33.65 18.42,33.65 OK1.1
N$4
  Bottom 0.305: OK1.2 19.05,31.75 20.96,33.65 20.96,38.1 9.53,38.1 8.26,39.37 8.26,47.62 50.17,47.62 53.98,51.43 55.25,51.43 D1.A
N$5  (via drill 0.35)
  Top 0.203: v41.91,114.3 41.91,112.39 40.64,111.12 C4.1 | v45.72,114.3 45.72,119.38 IC2.9
  Bottom 0.203: v41.91,114.3 42.55,113.66 45.72,113.66 | 45.72,113.66 67.95,113.66 69.22,114.93 Q1.2 | 45.72,113.66 v45.72,114.3
N$6
  Bottom 0.203: 52.71,115.57 64.14,115.57 Q1.1 | 52.71,115.57 36.2,115.57 31.75,111.12 C5.1 | 52.71,115.57 48.9,119.38 IC2.10
N$7
  Bottom 0.305: 47.62,57.15 33.66,57.15 IC1.1 | 47.62,57.15 62.87,57.15 64.14,55.88 B1.+ 64.77,55.24 66.68,55.24 67.95,53.97 96.52,53.97 97.79,52.7 C1.+ | 47.62,57.15 47.62,62.23 C2.1
N$8  (via drill 0.35)
  Top 0.203: v78.11,86.99 78.11,100.33 73.66,104.77 DIS1.2
  Bottom 0.203: v78.11,86.99 79.38,85.72 92.08,85.72 93.98,87.63 111.12,87.63 114.94,83.82 RN1.9
N$9  (via drill 0.35)
  Top 0.203: v93.98,86.36 93.98,94.61 88.9,99.69 DIS1.15
  Bottom 0.203: v93.98,86.36 94.62,85.72 110.49,85.72 112.4,83.82 RN1.10
N$10  (via drill 0.35)
  Top 0.203: v108.59,93.98 109.22,93.34 109.22,84.45 109.86,83.82 RN1.11
  Bottom 0.203: v108.59,93.98 89.53,93.98 88.9,94.61 DIS1.13
N$11  (via drill 0.35)
  Top 0.203: v91.44,83.82 91.44,86.99 88.9,89.53 DIS1.11
  Bottom 0.203: v91.44,83.82 94.62,80.64 104.78,80.64 107.31,83.18 RN1.12
N$12  (via drill 0.35)
  Top 0.203: v105.41,95.25 105.41,83.82 RN1.13
  Bottom 0.203: v105.41,95.25 101.6,95.25 100.97,95.88 74.93,95.88 73.66,97.16 DIS1.5
N$13  (via drill 0.35)
  Top 0.203: v76.84,86.99 76.84,99.06 73.66,102.23 DIS1.3
  Bottom 0.203: v76.84,86.99 78.74,85.09 98.43,85.09 99.7,83.82 RN1.15
N$14  (via drill 0.35)
  Top 0.203: v92.71,83.82 92.71,93.34 88.9,97.16 DIS1.14
  Bottom 0.203: v92.71,83.82 95.25,81.28 100.33,81.28 102.23,83.18 RN1.14
N$15  (via drill 0.35)
  Top 0.203: v127.64,78.74 127.64,97.79 125.73,99.69 IC3.9
  Bottom 0.203: v127.64,78.74 118.11,78.74 115.57,76.2 RN1.8
N$16
  Top 0.203: RN1.7 113.03,76.2 116.84,80.01 116.84,104.77 119.38,107.31 122.56,107.31 122.56,100.33 IC3.10
N$17
  Top 0.203: RN1.6 110.49,75.56 112.4,73.66 126.37,73.66 126.37,90.8 127,91.44 127,93.34 120.65,99.69 IC3.11
N$18  (via drill 0.35)
  Top 0.203: v111.12,93.98 111.76,93.34 111.76,80.01 107.95,76.2 RN1.5
  Bottom 0.203: v111.12,93.98 114.94,97.79 115.57,97.79 117.47,99.69 IC3.12
N$19  (via drill 0.35)
  Top 0.203: v108.59,95.25 106.68,93.34 106.68,77.47 105.41,76.2 RN1.4
  Bottom 0.203: v108.59,95.25 111.12,97.79 113.03,97.79 114.94,99.69 IC3.13
N$20  (via drill 0.35)
  Top 0.203: v101.6,96.52 98.43,93.34 98.43,88.9 99.06,88.26 99.06,76.83 99.7,76.2 RN1.2
  Bottom 0.203: v101.6,96.52 102.87,97.79 107.95,97.79 109.86,99.69 IC3.15
N$21
  Top 0.203: RN1.3 102.23,76.2 101.6,76.83 101.6,86.36 104.14,88.9 104.14,113.03 111.76,120.65 113.03,120.65 113.03,100.33 IC3.14
N$22
  Bottom 0.203: RN2.9 40.64,100.96 52.07,100.96 53.34,102.23 53.34,104.77 51.44,104.77 DIS2.2
N$23
  Bottom 0.203: DIS2.15 66.04,99.69 64.77,98.42 40.64,98.42 38.1,100.96 RN2.10
N$24  (via drill 0.35)
  Top 0.203: v40.64,95.88 35.56,100.96 RN2.11
  Bottom 0.203: v40.64,95.88 65.41,95.88 66.04,95.25 DIS2.13
N$25  (via drill 0.35)
  Top 0.203: v36.83,90.17 34.29,90.17 34.29,99.69 33.02,100.96 RN2.12
  Bottom 0.203: v36.83,90.17 66.04,90.17 DIS2.11
N$26
  Bottom 0.203: DIS2.5 50.8,97.79 33.66,97.79 30.48,100.96 RN2.13
N$27
  Bottom 0.203: RN2.15 25.4,101.6 26.67,102.87 50.8,102.87 DIS2.3
N$28  (via drill 0.35)
  Top 0.203: v62.23,86.99 62.23,93.34 66.04,97.16 DIS2.14
  Bottom 0.203: v62.23,86.99 61.6,87.63 35.56,87.63 34.29,88.9 34.29,97.16 31.75,97.16 27.94,100.96 RN2.14
N$29  (via drill 0.35)
  Top 0.203: v41.91,104.14 41.91,95.25 40.64,93.98 RN2.8 | v98.43,104.77 99.06,105.41 99.06,121.28 97.79,122.55 IC4.9
  Bottom 0.203: v41.91,104.14 43.18,105.41 49.53,105.41 50.17,106.04 93.34,106.04 94.62,104.77 v98.43,104.77
N$30  (via drill 0.35)
  Top 0.203: v85.73,90.8 86.36,91.44 86.36,119.38 88.9,121.92 88.9,123.82 89.53,124.46 91.44,124.46 91.44,121.28 92.08,120.65 94.62,120.65 94.62,122.55 IC4.10
  Bottom 0.203: v85.73,90.8 40.64,90.8 38.1,93.34 RN2.7
N$31  (via drill 0.35)
  Top 0.203: v96.52,90.8 96.52,101.6 99.7,104.77 99.7,123.19 98.43,124.46 92.71,124.46 92.71,123.19 IC4.11
  Bottom 0.203: v96.52,90.8 93.98,88.26 35.56,88.26 35.56,93.34 RN2.6
N$32  (via drill 0.35)
  Top 0.203: v87.63,108.58 88.9,109.85 88.9,121.28 89.53,121.92 89.53,122.55 IC4.12
  Bottom 0.203: v87.63,108.58 24.13,108.58 24.13,99.69 24.77,99.06 27.31,99.06 32.39,93.98 RN2.5
N$33  (via drill 0.35)
  Top 0.203: v35.56,113.66 35.56,110.49 31.75,106.68 31.75,95.25 30.48,93.98 RN2.4 | v80.65,113.03 81.28,113.66 81.28,123.82 83.19,125.73 87,125.73 87,123.19 IC4.13
  Bottom 0.203: v35.56,113.66 36.2,113.03 v80.65,113.03
N$34  (via drill 0.35)
  Top 0.203: v26.67,124.46 26.67,95.25 25.4,93.98 RN2.2
  Bottom 0.203: v26.67,124.46 26.67,131.44 80.01,131.44 80.65,132.08 83.82,132.08 86.36,129.54 86.36,120.65 84.46,120.65 82.55,122.55 IC4.15
N$35  (via drill 0.35)
  Top 0.203: v29.21,128.91 29.21,95.25 27.94,93.98 RN2.3
  Bottom 0.203: v29.21,128.91 80.01,128.91 84.46,124.46 84.46,123.19 IC4.14
N$36  (via drill 0.35)
  Top 0.203: v53.34,97.16 53.34,77.47 IC5.15
  Bottom 0.203: v53.34,97.16 53.98,97.79 64.77,97.79 65.41,98.42 95.25,98.42 99.7,102.87 120.02,102.87 128.91,111.76 128.91,114.3 127,114.3 106.68,134.62 LED1.K
N$37
  Top 0.203: LED8.A 12.7,51.43 8.26,55.88 8.26,83.18 LED9.A 7.62,83.82 13.97,90.17 13.97,112.39 LED10.A 14.61,113.03 14.61,119.38 30.48,135.25 LED11.A | LED4.A 127,50.16 130.81,53.97 130.81,83.82 LED3.A 130.81,84.45 130.81,106.68 125.09,112.39 LED2.A 124.46,113.03 124.46,114.3 104.14,134.62 LED1.A
  Bottom 0.203: LED7.A 40.64,29.84 41.91,31.11 45.09,31.11 52.71,38.73 R4.2 53.34,38.73 53.98,38.73 70.48,22.22 | 70.48,22.22 71.12,21.59 LED6.A | 70.48,22.22 94.62,22.22 100.33,27.94 LED5.A 100.97,28.57 121.92,49.53 126.37,49.53 LED4.A | LED1.A 103.5,135.25 83.19,135.25 71.12,147.32 LED12.A 70.48,147.32 57.15,133.98 32.39,133.98 31.12,135.25 LED11.A
N$38  (via drill 0.35)
  Top 0.203: v60.96,99.69 60.96,82.55 55.88,77.47 IC5.14
  Bottom 0.203: v60.96,99.69 64.77,103.5 118.11,103.5 127,112.39 LED2.K
N$39
  Bottom 0.203: IC5.13 58.42,77.47 59.69,78.74 70.48,78.74 74.93,74.29 93.98,74.29 99.7,80.01 129.54,80.01 133.35,83.82 LED3.K
N$40  (via drill 0.35)
  Top 0.203: v69.85,61.59 69.85,71.75 66.04,71.75 60.96,76.83 IC5.12
  Bottom 0.203: v69.85,61.59 76.84,54.61 124.46,54.61 128.91,50.16 LED4.K
N$41  (via drill 0.35)
  Top 0.203: v96.52,73.02 102.87,66.67 102.87,28.57 LED5.K
  Bottom 0.203: v96.52,73.02 67.31,73.02 63.5,76.83 IC5.11
N$42
  Top 0.203: IC5.10 66.04,77.47 67.31,78.74 71.76,78.74 71.76,38.73 75.56,34.92 75.56,22.86 74.3,21.59 LED6.K
N$43
  Top 0.203: IC5.9 68.58,76.83 71.12,74.29 71.12,39.37 48.26,16.51 48.26,14.6 46.99,13.33 43.18,13.33 43.18,29.21 LED7.K
N$44  (via drill 0.35)
  Top 0.203: v66.68,53.97 66.68,68.58 66.04,69.21 IC5.7
  Bottom 0.203: v66.68,53.97 18.42,53.97 15.88,51.43 LED8.K
N$45
  Bottom 0.203: IC6.15 76.84,77.47 74.3,80.01 46.36,80.01 45.72,80.64 13.34,80.64 10.8,83.18 LED9.K
N$46
  Bottom 0.203: IC6.14 80.01,76.83 81.92,74.93 82.55,74.93 83.82,76.2 83.82,81.91 59.06,81.91 58.42,81.28 46.36,81.28 40.64,86.99 26.67,86.99 16.51,97.16 16.51,112.39 LED10.K
N$47
  Bottom 0.203: IC6.13 81.92,77.47 78.11,81.28 59.06,81.28 58.42,80.64 46.36,80.64 40.64,86.36 26.67,86.36 12.7,100.33 12.7,123.82 17.15,123.82 30.48,137.16 31.75,137.16 33.02,135.89 LED11.K
N$48
  Top 0.203: IC6.12 84.46,77.47 84.46,107.95 75.56,116.84 75.56,145.41 73.66,147.32 LED12.K
N$50
  Top 0.203: LED13.K 97.79,96.52 97.79,83.82 RN1.16
N$51  (via drill 0.35)
  Top 0.203: v62.23,107.31 v59.69,109.85
  Bottom 0.203: v59.69,109.85 22.86,109.85 22.86,101.6 RN2.16 | v62.23,107.31 62.87,106.68 93.98,106.68 94.62,106.04 LED14.A
N$52
  Top 0.203: LS1.P 60.33,140.97 69.22,149.86 83.19,149.86 83.19,130.81 C12.-
RESET
  Top 0.203: IC2.1 19.05,113.03 19.05,88.9 15.88,85.72 15.88,57.15 30.48,42.54 30.48,32.38 31.75,31.11 34.93,31.11 | 34.93,31.11 34.93,38.73 ISP1.5 | 34.93,31.11 34.93,19.05 38.74,15.24 R3.1

## Text on the board
tNames: ALARM | PM | Marcetux Electronics | AC in
bNames: +5V | LD_1 | 7_SEG3 | LD_10 | GND | RESET | ALARM | MINUTES | HOURS | Marcetux Electronics